# Altium PCB Pranus_PSH-C_B4_2015年3月30日.PcbDoc (part 1 of 2)
Units mil, origin at the board's own origin, x right, y up, seen from the top; angles counter-clockwise.
Board outline 3352.66 x 2784.14 mil, 2 copper layers (Top Layer, Bottom Layer); 108 components, 78 nets, 412 pads, 296 vias.
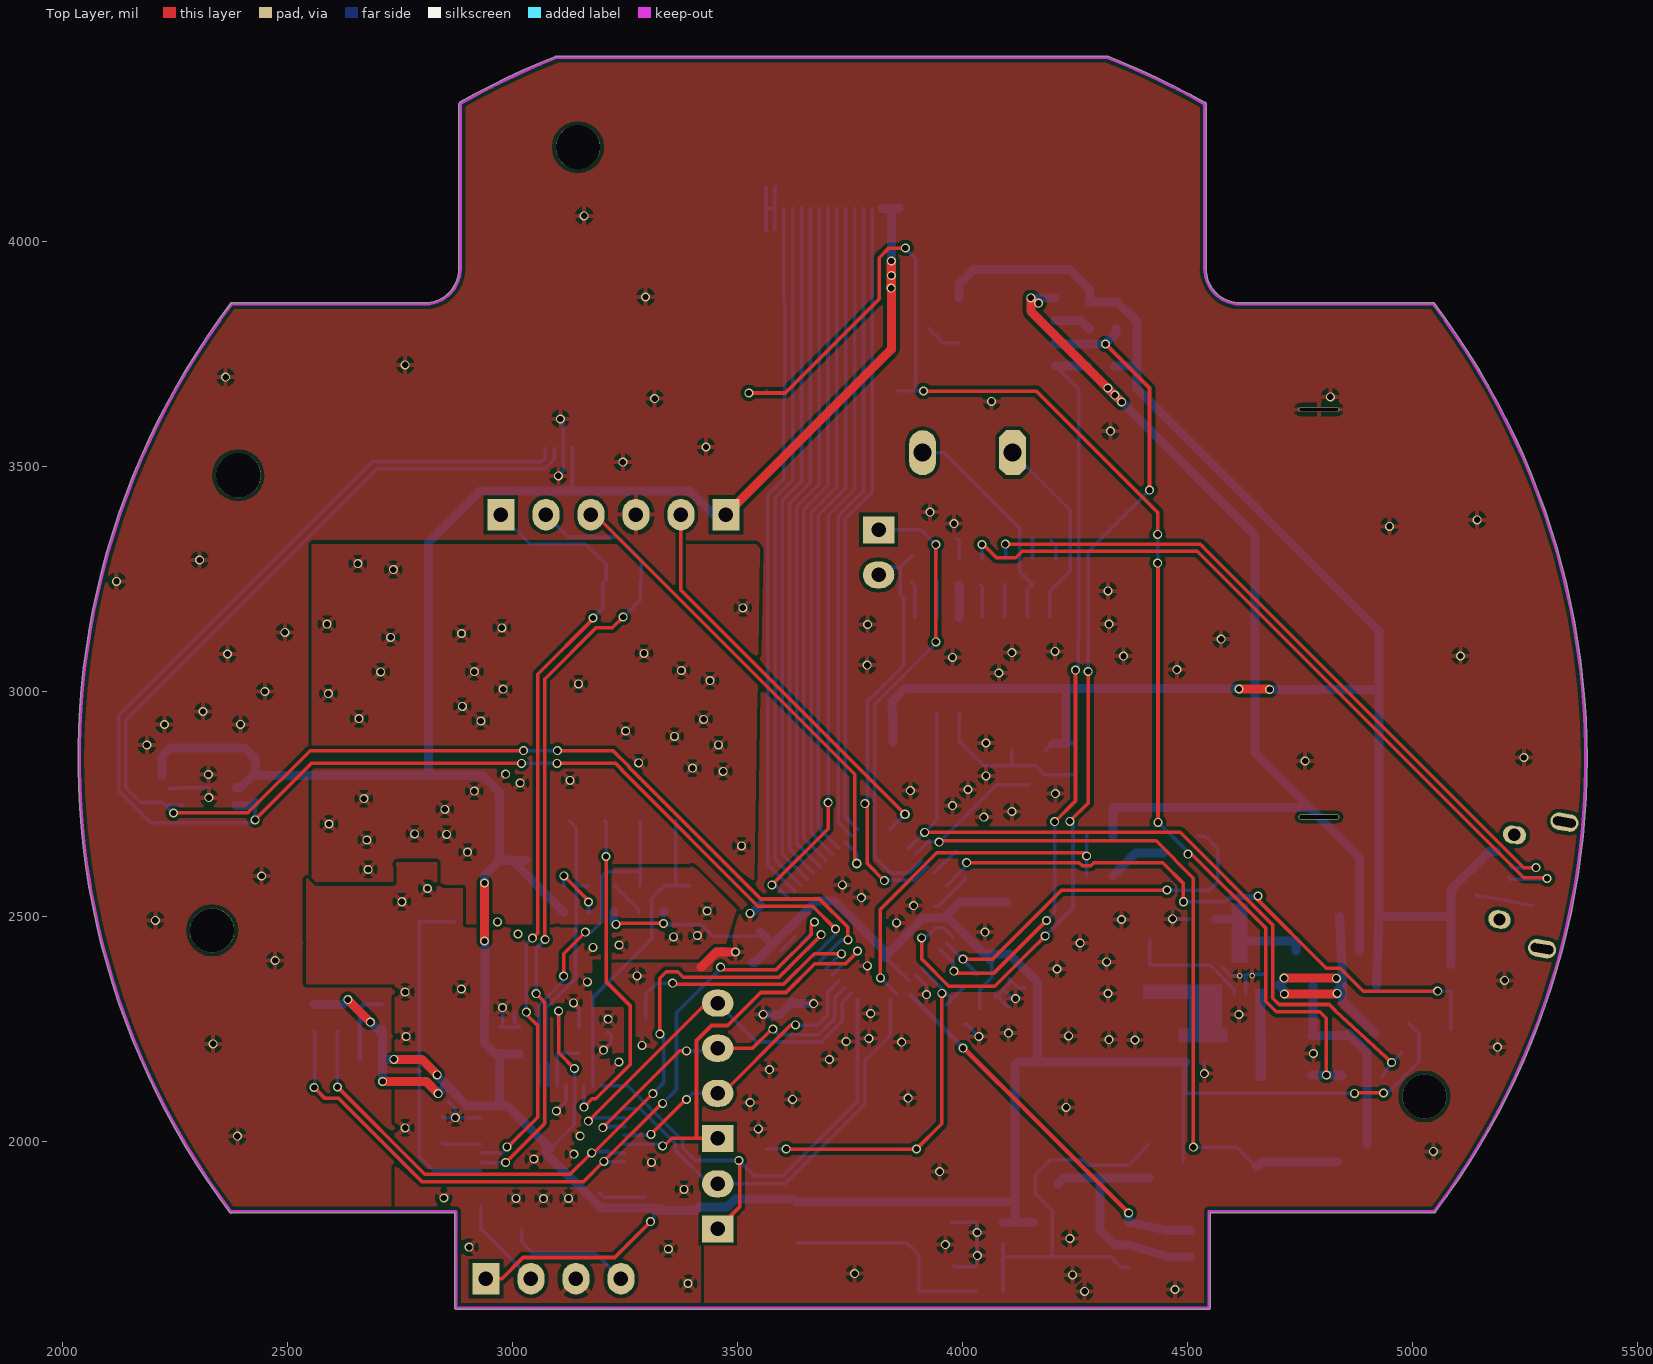
[diagram p0: Top Layer view]
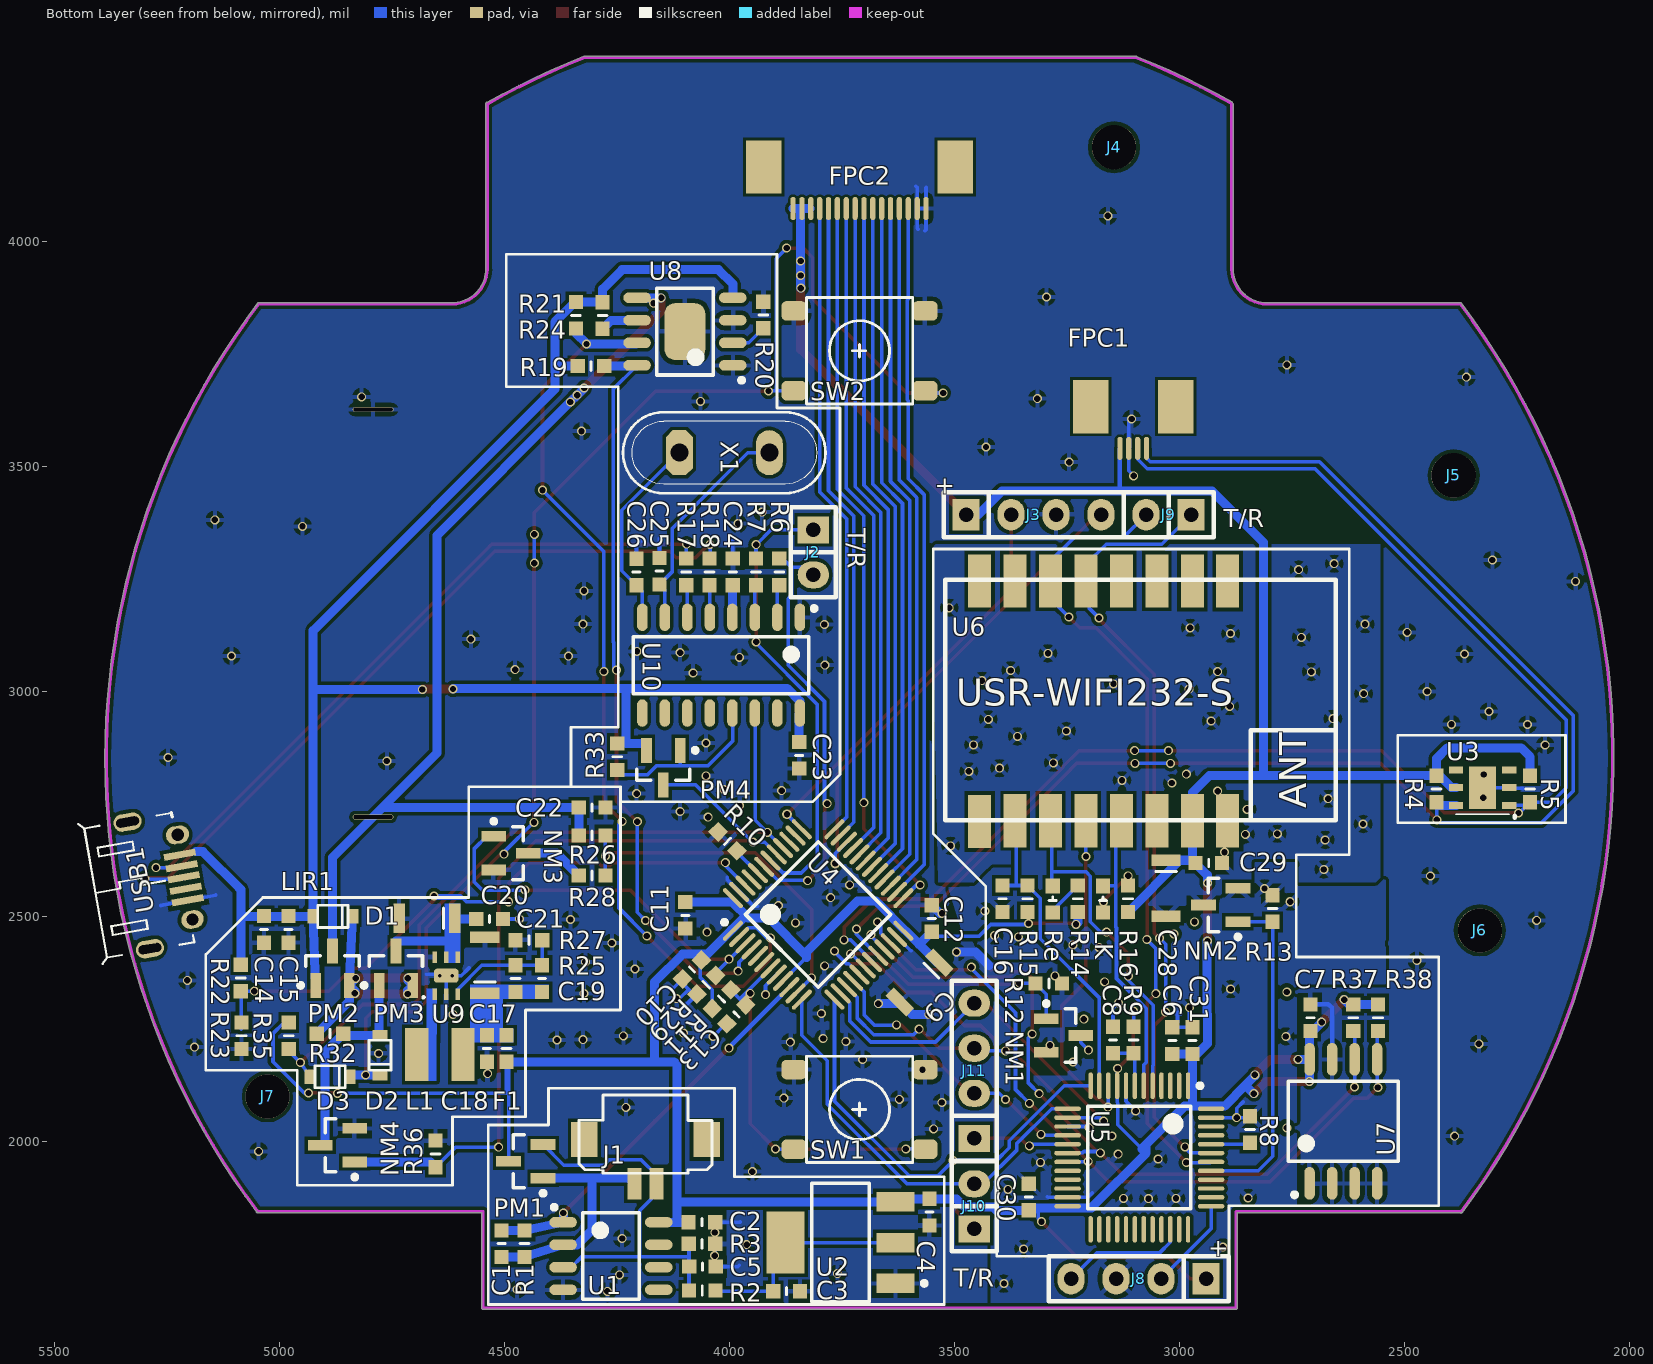
[diagram p1: Bottom Layer view, seen from below]

## Layer stack, top to bottom
Top Layer: signal copper 1.4
Dielectric: dielectric 12.6, FR-4, Dk 4.8
Bottom Layer: signal copper 1.4

## Board outline
2872.06,1630.69 2872.06,1841.53 2377.05,1841.53 cw(c2375.47,1844.27) 2372.95,1842.36 cw(c3711.84,2851.16) 2374.75,3862.35 cw(c2377.27,3860.44) 2377.27,3863.6 2806.32,3863.6 ccw(c2806.32,3939.18) 2881.9,3939.18 2881.9,4305.86 2883.5,4308.61 cw(c3711.83,2851.15) 3095.75,4410.24 cw(c3098.39,4408.5) 3098.39,4411.66 4322.19,4411.66 cw(c4322.19,4408.5) 4324.4,4410.77 cw(c3711.83,2851.15) 4537.94,4308.95 cw(c4538.61,4305.86) 4541.77,4305.86 4541.77,3939.18 ccw(c4617.35,3939.18) 4617.35,3863.6 5046.4,3863.6 cw(c5046.4,3860.44) 5048.92,3862.35 cw(c3711.84,2851.16) 5388.23,2851.16 cw(c3711.84,2851.16) 5051.74,1843.72 cw(c5048.85,1844.99) 5048.85,1841.83 4551.62,1841.83 4551.62,1630.69 cw(c4548.45,1630.69) 4548.45,1627.52 2875.22,1627.52 cw(c2875.22,1630.69)

## Design rules (kind name [scope] priority, off if disabled: settings)
Clearance "6mil Special" [(HasFootprint('FPC 0.5mm 4P') OR HasFootprint('FPC 0.5mm 16P'))] p1: gap=6
Clearance "8mil all" [All] p2: gap=8
ComponentClearance [All] p1: gap=0 collisioncheckmode=3 verticalgap=10 showdistances=FALSE
Height [All] p1: minheight=0 maxheight=2000 prefheight=500
HoleSize [All] p1: absolutevalues=TRUE maxlimit=1000 minlimit=1 maxpercent=80.000 minpercent=20.000
HoleToHoleClearance [All] p1: gap=8 allowstackedmicrovias=TRUE
MinimumSolderMaskSliver [All] p1: minsoldermaskwidth=0
PolygonConnect [All] p1: connectstyle=Relief reliefconductorwidth=10 reliefentries=4 polygonreliefangle="90 Angle" airgapwidth=10
RoutingCorners [All] p1: cornerstyle=45-Degree minsetback=10 maxsetback=100
RoutingVias [All] p1: holewidth=14 width=20 viastyle="Through Hole" minholewidth=14 minwidth=20 maxholewidth=100 maxwidth=200
SilkToSilkClearance [All] p1: silktosilkclearance=8
SilkToSolderMaskClearance [IsPad] p1: minsilkscreentomaskgap=0 clearancetoexposedcopper=TRUE
SolderMaskExpansion [All] p1: expansion=4
Width 20mil_Power [(InNet('EP_SUPPLY&VBAT') OR InNet('PSUPPLY') OR InNet('P_3.3V') OR InNet('PSUPPLYBAT') OR InNet('P_3.3V') OR InNet('P_5V'))] p1: maxlimit=1000 minlimit=8 preferedwidth=20
Width 8mil_Basic [All] p2: maxlimit=20 minlimit=8 preferedwidth=10
20 further rules are at their usual default settings.

## Classes and differential pairs
component class HCHOADC: C1 C2 C3 C4 C5 J1 PM1 R1 R2 R3 U1 U2
component class MCU: C6 C7 C8 C9 C10 C11 C12 C13 C16 C28 C29 C30 C31 FPC1 FPC2 J2 J3 J4 J5 J6 J7 J8 J9 J10 J11 Lk NM1 NM2 R4 R5 R6 R7 R8 R9 R10 R11 R12 R13 R14 R15 R16 R37 R38 Re SW1 U3 U4 U5 U6 U7
component class POWER: C14 C15 C17 C18 C19 C20 C21 C22 C23 C24 C25 C26 D1 D2 D3 F1 L1 LIR1 NM3 NM4 PM2 PM3 PM4 R17 R18 R19 R20 R21 R22 R23 R24 R25 R26 R27 R28 R29 R32 R33 R35 R36 SW2 U8 U9 U10 USB1 X1

## Components (designator, comment, footprint, x,y, rotation, side; value= is the part's Value field where it differs from the comment)
C1 "4.7uf" C0603 4506.95,1773.08 r90 bottom
C2 "1uf" C0603 4061.88,1820.64 r0 bottom
C3 "1uf" C0603 3873.89,1667.42 r0 bottom
C4 "1uf" C0603 3556.27,1843.13 r90 bottom
C5 "1uf" C0603 4060.6,1721.92 r0 bottom
C6 "1uf" C0603 2972.23,2224.16 r90 bottom
C7 "1uf" C0603 2710,2275 r90 bottom
C8 "1uf" C0603 3148.51,2225.58 r90 bottom
C9 "10uf" PolarC1206 3578.2,2353.7 r315 bottom
C10 "1uf" C0603 4083.99,2382.28 r315 bottom
C11 "1uf" C0603 4098.91,2502.47 r270 bottom
C12 "1uf" C0603 3551.32,2495.45 r90 bottom
C13 "1uf" C0603 3985.44,2282.59 r315 bottom
C14 "10uf" C0603 5034.76,2471.17 r90 bottom
C15 "1uf" C0603 4980.76,2471.17 r90 bottom
C16 "1uf" C0603 3394.26,2539.34 r270 bottom
C17 "10uf" PolarC1206 4544.25,2391.51 r90 bottom
C18 "1uf" C0603 4539.78,2206.54 r270 bottom
C19 "75pf" C0603 4417.11,2362.03 r90 bottom
C20 "10uf" PolarC1206 4672.74,2495.88 r0 bottom
C21 "1uf" C0603 4533.69,2494.24 r0 bottom
C22 "10uf" C0603 4305.93,2741.88 r0 bottom
C23 "1uf" C0603 3845.86,2857.97 r270 bottom
C24 "0.01uf" C0603 3993.39,3265.57 r90 bottom
C25 "12pf" C0603 4156.16,3267.17 r90 bottom
C26 "12pf" C0603 4207.46,3265.27 r90 bottom
C28 "10uf" PolarC1206 3030.78,2562.67 r270 bottom
C29 "1uf" C0603 2935.96,2618.63 r180 bottom
C30 "1uf" C0603 3335.66,1876.67 r90 bottom
C31 "1uf" C0603 3016.82,2224.16 r90 bottom
D1 "1N5817" SOD323(0805) 4881.76,2500.17 r180 bottom
D2 "1N5817" SOD323(0805) 4777.18,2191.74 r270 bottom
D3 "1N5817" SOD323(0805) 4888.17,2143.94 r180 bottom
F1 "11R" R0603 4496.24,2206.54 r270 bottom (schematic designator Ferrite1)
FPC1 "FPC 4P" "FPC 0.5mm 4P" 3133.2,3540.07 r0 bottom
FPC2 "FPC 0.5mm 16P" "FPC 0.5mm 16P" 3711.76,4119.16 r0 bottom
J1 "Mx 1.25 2P" "MX 1.25 2P" 4187.19,1955.26 r0 bottom
J2 "CON2" CON2 3814.16,3308.97 r270 bottom
J3 "CON4" CON4 3325.06,3392.67 r180 bottom
J4 "CON1" 2.5MM 3146.33,4209.04 r180 bottom locked
J5 "CON1" 2.5MM 2391.76,3480.17 r180 bottom
J6 "CON1" 2.5MM 2333.41,2468.89 r180 bottom locked
J7 "CON1" 2.5MM 5027.11,2099.99 r180 bottom locked
J8 "CON4" CON4 3091.76,1695.17 r0 bottom
J9 "CON2" CON2 3025.06,3392.67 r0 bottom
J10 "CON2" CON2 3456.86,1856.07 r90 bottom
J11 "CON4" CON4 3456.76,2157.17 r90 bottom
L1 "4.4uh" GDNR3012 4644.36,2193.34 r270 bottom
LIR1 "LIR2477" LIR2477_INLINE 4792.58,3193.4 r270 bottom
LK "White" LED0603 3170.91,2538.36 r90 bottom (schematic designator LED1)
NM1 "Si2302" SOT23-3 3258.58,2235.57 r180 bottom
NM2 "Si2302" SOT23-3 2909.44,2525.55 r0 bottom
NM3 "Si2302" SOT23-3 4486.07,2640.6 r180 bottom
NM4 "Si2302" SOT23-3 4871.69,1991.75 r0 bottom
PM1 "J177" SOT23-3 4453.16,1955.92 r0 bottom
PM2 "Si2303" SOT23-3 4882.76,2385.17 r90 bottom
PM3 "Si2303" SOT23-3 4741.76,2385.17 r90 bottom
PM4 "Si2303" SOT23-3 4147.76,2830.67 r270 bottom
R1 "1M" R0603 4456.23,1773.08 r90 bottom
R2 "10K" R0603 4061.18,1668.76 r180 bottom
R3 "2K" R0603 4061.71,1772.76 r0 bottom
R4 "10K" R0603 2429.86,2783.17 r270 bottom
R5 "10K" R0603 2221.86,2783.17 r270 bottom
R6 "1K" R0603 3890.06,3265.57 r270 bottom
R7 "1K" R0603 3941.73,3265.57 r270 bottom
R8 "10K" R0603 2844.01,2026.57 r90 bottom
R9 "10K" R0603 3102.72,2225.57 r90 bottom
R10 "10K" R0603 4005.06,2666.97 r225 bottom
R11 "10K" R0603 4018.25,2316.32 r135 bottom
R12 "10K" R0603 3291.16,2350.85 r0 bottom
R13 "10K" R0603 2793.91,2517.61 r270 bottom
R14 "1K" R0603 3226.75,2539.34 r270 bottom
R15 "10K" R0603 3338.42,2539.34 r270 bottom
R16 "1K" R0603 3115.07,2539.34 r270 bottom
R17 "55" R0603 4096.73,3265.57 r270 bottom
R18 "55" R0603 4045.06,3265.57 r270 bottom
R19 "10K" R0603 4308.36,3722.77 r180 bottom
R20 "10K" R0603 3925.56,3836.37 r90 bottom
R21 "10K" R0603 4342.06,3835.57 r270 bottom
R22 "15K" R0603 5086.56,2363.27 r90 bottom
R23 "10K" R0603 5085,2235 r90 bottom
R24 "10K" R0603 4282.56,3835.27 r270 bottom
R25 "120K" R0603 4475.94,2362.03 r270 bottom
R26 "1M" R0603 4305.99,2680.2 r180 bottom
R27 "27K" R0603 4446.31,2447.29 r180 bottom
R28 "1M" R0603 4305.89,2591 r0 bottom
R29 "10K" R0603 4052.29,2348.29 r135 bottom
R32 "10K" R0603 4888.17,2239.55 r0 bottom
R33 "10K" R0603 4250,2855 r270 bottom
R35 "10K" R0603 4980,2235 r90 bottom
R36 "10K" R0603 4653.76,1972.38 r270 bottom
R37 "1K" R0603 2615,2275 r90 bottom
R38 "1K" R0603 2560,2275 r270 bottom
Re "White" LED0603 3282.59,2538.36 r90 bottom
SW1 "6x6x5" Patch6x6x5 3711.76,2071.17 r0 bottom locked
SW2 "6x6x5" Patch6x6x5 3711.76,3756.72 r0 bottom locked
U1 "AD8629ARZ" SOIC8_39MM 4264.14,1745.55 r180 bottom
U2 "1117-1.2" SOT223 3754.08,1775.41 r90 bottom
U3 "HTU21D" HTU21D 2327.41,2786.2 r90 bottom
U4 "STM32F030C8T6" TSQFP50P900X900X160-48L 3803.77,2504.47 r135 bottom
U5 "STM32F030C8T6" TSQFP50P900X900X160-48L 3090.16,1964.41 r270 bottom
U6 "USR-WIFI232-S" USR-WIFI232-S 3046.76,2978.17 r180 bottom
U7 "24LC512K" SOIC8_53MM 2636.46,2045.27 r90 bottom
U8 "TP4056" SOIC8 4099.71,3799.49 r0 bottom
U9 "TPS62260" QFN2X2-6 4655.76,2327.17 r90 bottom
U10 "CH340G" SOP-16 4019.2,3058.27 r270 bottom
USB1 "MicroUSB" MICROUSB 5261.76,2578.18 r170 bottom locked
X1 "12MHZ" HC-49 4012.16,3530.37 r180 bottom

## Footprints (in the part's own frame and the unit in brackets; to place one, negate y for a bottom-side part, rotate by r counter-clockwise, add the part's x,y. Pads: shape width x height; smd on the part's side, far side on the other; paste and mask are expansions set on the pad)
2.5MM [mm]
  round 2.5 hole 2.5: 1(0,0)
C0603 [mm]
  rect 0.8x0.8 smd: 1(-0.75,0) 2(0.75,0)
  silkscreen extent 0,-0.2 0,0.2, body extent -0.8,-0.4 0.8,0.4, height 0.8
CON2 [mil]
  rect 60x70 hole 32: 1(-50,0)
  oval 60x70 hole 32: 2(50,0)
  silkscreen extent -100,-50 100,50, body extent -101,-50 100,50, height 295
CON4 [mil]
  rect 60x70 hole 32: 1(-150,0)
  oval 60x70 hole 32: 2(-50,0) 3(50,0) 4(150,0)
  silkscreen extent -200,-50 200,50, body extent -201,-50 199,50, height 295
"FPC 0.5mm 4P" [mm]
  oval 0.3x1.3 smd: 1(-1.5,0) 2(-1,0) 3(-0.5,0) 4(0,0)
  rect 2x3 smd: ""(-3.15,-2.35) ""(1.65,-2.35)
  body extent -4.54,-5.07 3.1,0.5, height 2
"FPC 0.5mm 16P" [mm]
  oval 0.3x1.3 smd: 1(-3.75,1.175) 2(-3.25,1.175) 3(-2.75,1.175) 4(-2.25,1.175) 5(-1.75,1.175) 6(-1.25,1.175) 7(-0.75,1.175) 8(-0.25,1.175) 9(0.25,1.175) 10(0.75,1.175) 11(1.25,1.175) 12(1.75,1.175) 13(2.25,1.175) 14(2.75,1.175) 15(3.25,1.175) 16(3.75,1.175)
  rect 2x3 smd: ""(-5.4,-1.175) ""(5.4,-1.175)
  body extent -6.79,-3.89 6.75,1.68, height 2
GDNR3012 [mm]
  rect 3x1.3 smd: 1(0,1.3) 2(0,-1.3)
  body extent -1.5,-1.5 1.5,1.5, height 1.2
HC-49 [mil]
  oct 60x100 hole 40: 1(-100,0)
  oval 60x100 hole 40: 2(100,0)
  silkscreen extent -225,-90 225,90, body extent -224,-91 226,89, height 134
HTU21D [mm]
  rect 2.4x1.524 smd: 0(0,0)
  rect 0.4x0.8 smd: 1(-1,-1.5) 2(0,-1.5) 3(1,-1.5) 4(1,1.5) 5(0,1.5) 6(-1,1.5)
  silkscreen extent -1.7,-1.8 -1.5,1.5
LED0603 [mm]
  rect 0.8x0.8 smd: A(-0.75,0)
  rect 0.85x0.8 smd: C(0.75,0)
  silkscreen extent -0.07,-0.2 0.13,0.2, body extent -0.8,-0.4 0.8,0.4, height 0.8
LIR2477_INLINE [mm]
  oval 0.3x2.3 hole 0.2 slot 2.2 at 90 deg: 1(12,0)
  oval 0.25x2.3 hole 0.2 slot 2.2 at 90 deg: 2(-11,0)
  body extent -12,-12.08 12.1,12.08, height 7.7
MICROUSB [mm]
  oval 1.6x1 hole 0.5 slot 1.3 at 0 deg unplated: 0(-1.325,-3.625) 0(-1.325,3.625)
  rect 1.8x0.4 smd: 1(1.25,1.3) 2(1.25,0.65) 3(1.25,0) 4(1.25,-0.65) 5(1.25,-1.3)
  oval 1.321x1.016 hole 0.7 unplated: ""(1.325,2.425)
  oval 1.27x1.016 hole 0.7 unplated: ""(1.325,-2.425)
  silkscreen extent -4.1,-4 1.2,4, body extent -3.62,-3.96 1.81,4.02, height 2.74
"MX 1.25 2P" [mm]
  rect 0.8x1.8 smd: 1(-0.625,1.25) 2(0.625,1.25)
  rect 1.5x2 smd: ""(-3.45,-1.25) ""(3.45,-1.25)
  silkscreen extent -3.75,-3.76 3.75,0.66, body extent -3.74,-3.79 3.75,1.67, height 3.5
Patch6x6x5 [mm]
  rrect50% 1.4x1.1 smd: 1(-3.7,2.25) 2(-3.7,-2.25) 3(3.7,-2.25) 4(3.7,2.25)
  silkscreen extent -3,-3 3,3, body extent -4.13,-3 4.13,3, height 5
PolarC1206 [mm]
  rect 0.65x1.65 smd: A(-1.575,0) C(1.575,0)
  silkscreen extent -0.94,-0.58 -0.94,0.58, body extent -1.6,-0.8 1.6,0.8, height 0.6
QFN2X2-6 [mm]
  rect 0.65x0.25 smd: 1(0,0) 2(0,-0.65) 3(0,-1.3) 4(2.1,-1.3) 5(2.1,-0.65) 6(2.1,0)
  round 0.3 hole 0.2: 7(1.04,-1) 7(1.05,-0.29)
  rrect50% 0.8x1.4 smd: 7(1.05,-0.65)
  body extent 0.22,-1.59 1.86,0.29, height 3.4
R0603 [mm]
  rect 0.8x0.8 smd: 1(-0.75,0) 2(0.75,0)
  silkscreen extent 0,-0.25 0,0.25, body extent -0.8,-0.4 0.8,0.4, height 0.5
SOD323(0805) [mm]
  rect 0.63x0.83 smd: A(-1.115,0) C(1.115,0)
  silkscreen extent -0.85,-0.63 0.85,0.63, body extent -0.85,-0.63 0.86,0.63, height 1.1
SOIC8 [mm]
  oval 1.55x0.6 smd: 1(-2.7,1.905) 2(-2.7,0.635) 3(-2.7,-0.635) 4(-2.7,-1.905) 5(2.7,-1.905) 6(2.7,-0.635) 7(2.7,0.635) 8(2.7,1.905)
  rrect50% 2.3x3.2 smd: 9(0,0)
  silkscreen extent -3.32,-2.45 1.6,2.87, body extent -1.65,-2.41 1.65,2.41, height 1.35
SOIC8_39MM [mm]
  oval 1.55x0.6 smd: 1(-2.7,1.905) 2(-2.7,0.635) 3(-2.7,-0.635) 4(-2.7,-1.905) 5(2.7,-1.905) 6(2.7,-0.635) 7(2.7,0.635) 8(2.7,1.905)
  silkscreen extent -3.33,-2.45 1.6,2.87, body extent -1.65,-2.41 1.65,2.41, height 3.4
SOIC8_53MM [mm]
  oval 1.85x0.6 smd: 1(-3.51,1.915) 2(-3.51,0.645) 3(-3.51,-0.625) 4(-3.51,-1.895) 5(3.49,-1.895) 6(3.49,-0.625) 7(3.49,0.645) 8(3.49,1.915)
  silkscreen extent -4.28,-3.09 2.24,3.11, body extent -2.26,-3.11 2.24,3.11, height 3.4
SOP-16 [mm]
  oval 1.55x0.6 smd: 1(-2.7,4.445) 2(-2.7,3.175) 3(-2.7,1.905) 4(-2.7,0.635) 5(-2.7,-0.635) 6(-2.7,-1.905) 7(-2.7,-3.175) 8(-2.7,-4.445) 9(2.7,-4.445) 10(2.7,-3.175) 11(2.7,-1.905) 12(2.7,-0.635) 13(2.7,0.635) 14(2.7,1.905) 15(2.7,3.175) 16(2.7,4.445)
  silkscreen extent -3.32,-4.95 1.6,5.37, body extent -1.91,-4.95 1.91,4.95, height 1
SOT23-3 [mm]
  rect 1.4x0.6 smd: 1(-0.975,0.95) 2(-0.975,-0.95) 3(0.975,0)
  silkscreen extent -1.1,-1.5 0.7,1.92, body extent -0.7,-1.5 0.7,1.5, height 1
SOT223 [mm]
  rect 1.1x2.15 smd: 1(-2.3,-3.1) 2(0,-3.1) 3(2.3,-3.1)
  rect 3.5x2.15 smd: 4(0,3.1)
  silkscreen extent -3.35,-4.85 3.35,1.63, body extent -3.3,-3.2 3.3,3.1, height 1.7
TSQFP50P900X900X160-48L [mm] "TSQFP, 48-Leads, Body 7.00x7.00mm, Pitch 0.50mm, IPC High Density"
  oval 1.5x0.25 smd: 1(-4.05,2.75) 2(-4.05,2.25) 3(-4.05,1.75) 4(-4.05,1.25) 5(-4.05,0.75) 6(-4.05,0.25) 7(-4.05,-0.25) 8(-4.05,-0.75) 9(-4.05,-1.25) 10(-4.05,-1.75) 11(-4.05,-2.25) 12(-4.05,-2.75) 25(4.05,-2.75) 26(4.05,-2.25) 27(4.05,-1.75) 28(4.05,-1.25) 29(4.05,-0.75) 30(4.05,-0.25) 31(4.05,0.25) 32(4.05,0.75) 33(4.05,1.25) 34(4.05,1.75) 35(4.05,2.25) 36(4.05,2.75)
  oval 0.25x1.5 smd: 13(-2.75,-4.05) 14(-2.25,-4.05) 15(-1.75,-4.05) 16(-1.25,-4.05) 17(-0.75,-4.05) 18(-0.25,-4.05) 19(0.25,-4.05) 20(0.75,-4.05) 21(1.25,-4.05) 22(1.75,-4.05) 23(2.25,-4.05) 24(2.75,-4.05) 37(2.75,4.05) 38(2.25,4.05) 39(1.75,4.05) 40(1.25,4.05) 41(0.75,4.05) 42(0.25,4.05) 43(-0.25,4.05) 44(-0.75,4.05) 45(-1.25,4.05) 46(-1.75,4.05) 47(-2.25,4.05) 48(-2.75,4.05)
  silkscreen extent -4.17,-2.9 2.9,3.55, body extent -3.5,-3.5 3.5,3.5, height 1.6
USR-WIFI232-S [mm]
  rect 1.3x3 smd: 1(3.886,6.794) 2(1.887,6.794) 3(-0.112,6.794) 4(-2.112,6.794) 5(-4.111,6.794) 6(-6.111,6.795) 7(-8.11,6.795) 8(-10.109,6.795) 9(-10.109,-6.794) 10(-8.11,-6.744) 11(-6.111,-6.744) 12(-4.111,-6.744) 13(-2.112,-6.744) 14(-0.112,-6.744) 15(1.887,-6.744) 16(3.886,-6.744)
  silkscreen extent -12.07,-6.72 9.98,6.85, body extent -12.07,-6.73 10.03,6.86, height 3.4

## Part data
C1 C2 C3 C4 C5 C6 C7 C8 C10 C11 C12 C13 C14 C15 C16 C18 C19 C21 C22 C23 C24 C25 C26 C29 C30 C31: library part C
C9 C17 C20 C28: library part PolarCap
D1 D2 D3: library part Diode
F1 R1 R2 R3 R4 R5 R6 R7 R8 R9 R10 R11 R12 R13 R14 R15 R16 R17 R18 R19 R20 R21 R22 R23 R24 R25 R26 R27 R28 R29 R32 R33 R35 R36 R37 R38: library part R
FPC2: library part "FPC 16P"
J1: library part MX
L1: library part L
LK Re: library part LED
NM1 NM2 NM3 NM4: library part NMOS
PM2 PM3 PM4: library part PMOS
SW1 SW2: library part SW
U1: library part AD8629, "Amplifier"
U2: library part 1117
X1: library part CRYSTAL

## Via types
v1: diameter 20, hole 14, Top Layer to Bottom Layer, 294 vias
v2: diameter 22, hole 14, Top Layer to Bottom Layer, 2 vias

## Nets (pads, with @x,y where several pads share a name; then routed paths per layer and width w, separated by ;. In a path a pad name is that pad's centre, name@x,y a point inside that pad or via, vN(x,y) a via of type N, cw(c..) or ccw(c..) an arc to the next point about the centre after c; other vN are vias at no path point)
EP_SUPPLY&VBAT: D1.C PM2.2 PM3.2 R32.2 | length 613.7
  Top Layer w20: v1(4715.46,2362.98) 4831.01,2362.98 v1(4831.31,2362.68) ; v1(4715.75,2327.72) 4831.61,2327.72 v1(4833.09,2329.2)
  Bottom Layer w20: v1(4715.46,2362.98) 4715.46,2357.89 PM3.2@4704.36,2346.78 4715.75,2335.39 v1(4715.75,2327.72) ; v1(4831.31,2362.68) PM2.2@4845.26,2348.73 ; v1(4833.09,2329.2) 4833.09,2334.52 PM2.2@4845.36,2346.78 ; D1.C@4837.86,2500.17 4844.55,2363.33 PM2.2@4845.26,2348.73 ; R32.2@4917.7,2239.55 4845.36,2311.89 PM2.2@4845.36,2346.78 ; PM2.2@4845.26,2348.73 PM2.2@4845.36,2346.78 ; PM2.2@4845.26,2348.73 4845.36,2348.63 PM2.2@4845.36,2346.78
GND: C2.1 C3.1 C4.1 C5.1 C7.2 C9.C C10.2 C11.2 C12.2 C13.2 C14.1 C15.1 C17.C C18.2 C20.C C21.1 C22.1 C23.2 C24.2 C25.2 C26.2 FPC1.3 FPC2.1 FPC2.2 J3.3 LIR1.2 NM1.2 NM3.2 NM4.2 R3.1 R10.1 R12.1 R20.2 R23.1 R27.1 R29.1 R36.1 SW1.2 SW1.3 SW2.2 SW2.3 U1.4 U2.1 U3.0 U3.2 U4.8 U4.23 U4.47 U7.1 U7.2 U7.3 U7.4 U7.7 U8.1 U8.3 U8.9 U9.2 U9.6 U9.7 U10.1 USB1.5 | length 2041.6
  Top Layer w20: 3420.06,2387.17 3453.75,2420.86 v1(3496.18,2420.86)
  Bottom Layer w8: 2237.04,2783.29 2238.7,2784.95 2267.1,2784.95 U3.2@2268.35,2786.2 U3.0@2327.41,2786.2 ; v1(3102.51,3479.02) 3113.52,3490.03 FPC1.3@3113.52,3540.07 3113.52,3599.12 v1(3107.2,3605.44) ; 3563.15,4119.85 3564.12,4118.88 FPC2.1@3564.12,4072.9 ; 3566.36,4023.76 3564.12,4026 FPC2.1@3564.12,4072.9 ; 3581.77,4026.77 3583.81,4028.81 FPC2.2@3583.81,4072.9 ; 3586.97,4122.65 3583.81,4119.49 FPC2.2@3583.81,4072.9 ; 3596.57,2423.84 3597.87,2423.84 U4.23@3628.39,2454.36 ; U4.8@3895.64,2370.84 3920.66,2345.82 v1(3920.66,2326.37) ; 3937.87,2522.5 3947.07,2522.5 U4.47@3979.15,2554.58 4005.95,2581.38 4005.95,2586.59 ; v1(3962.36,1770.77) v1@3964.35,1772.76 ; 3976.56,1821.37 3977.29,1820.64 C2.1@4032.35,1820.64 4032.35,1723.2 C5.1@4031.07,1721.92 3982.41,1721.92 3979.06,1725.27 ; 3987.96,3340.07 3993.39,3334.64 C24.2@3993.39,3295.1 ; C13.2@4006.32,2261.71 4006.32,2259.21 4011.22,2259.21 v1(4037.06,2233.37) ; 4105.06,2298.67 4101.91,2298.67 R29.1@4077.19,2323.39 ; v1(4118.46,2317.17) 4112.06,2317.17 4091.52,2337.71 ; 4138.16,2340.67 4125.6,2340.67 C10.2@4104.87,2361.4 4104.87,2351.06 4091.52,2337.71 ; C25.2@4156.16,3296.7 4156.16,3339.57 4156.26,3339.67 ; 4197.36,3334.87 4207.46,3324.77 C26.2@4207.46,3294.8 ; v1(4467.56,2494.87) 4468.19,2494.24 C21.1@4504.16,2494.24 ; v1(4537.86,2150.67) 4537.86,2175.09 C18.2@4539.78,2177.01 ; 4579.42,2385.61 4596.52,2368.51 U9.7@4630.17,2368.51 ; U9.2@4630.17,2327.17 U9.7@4630.17,2368.51 ; 4674.73,2371.54 4633.2,2371.54 U9.7@4630.17,2368.51 ; 5142.03,2547.58 USB1.5@5204.41,2536.32 5264.57,2524.37 ; FPC2.1@3564.12,4072.9 FPC2.2@3583.81,4072.9 ; R29.1@4077.19,2323.39 4091.52,2337.71 ; R29.1@4077.19,2323.39 4073.17,2319.36 R29.1@4073.17,2327.41 R29.1@4077.19,2323.39
  Bottom Layer w10: U7.7@2661.85,2182.67 2661.85,2296.85 2670,2305 2670.47,2304.53 C7.2@2710,2304.53
  Bottom Layer w20: 3423.67,2390.57 3453.96,2420.86 v1(3496.18,2420.86) ; v1(3528.44,2507.06) 3533.4,2507.06 C12.2@3551.32,2524.98 ; v1(3557.7,2282.62) 3594.81,2282.62 C9.C@3622.05,2309.85 3625.61,2306.29 v1(3669.86,2306.29)
  other v1: 4271.94,1666.99 4472.64,1671.17 4245.18,1703.78 3761.06,1706.17 4033.56,1746.27 4239.06,1784.57 4033.16,1797.97 3950.06,1932.97 5046.76,1978.07 2389.52,2011.79 3547.16,2028.27 4231.06,2075.87 3529.06,2086.57 3623.36,2093.57 3879.86,2096.17 3571.96,2159.67 3704.76,2182.37 4780.26,2195.67 5189.36,2209.57 3288.56,2213.77 2335.76,2216.86 3865.66,2220.67 3742.16,2221.97 4383.96,2225.47 4326.16,2226.37 3792.66,2228.97 4236.66,2234.77 4102.76,2240.67 4614.46,2282.17 3796.56,2284.37 4324.06,2328.67 5205.36,2358.17 3277.66,2368.07 4210.76,2383.17 3789.06,2390.17 4321.06,2399.27 2473.46,2402.07 4262.26,2441.17 4050.59,2465.21 3853.91,2485.88 2207.41,2491.37 4353.96,2493.17 3892.31,2523.81 3775.76,2541.64 3733.71,2570.43 2443.66,2589.97 4047.96,2720.57 4110.26,2733.07 3978.66,2746.07 2326.22,2763.8 4207.06,2772.67 3884.76,2779.57 4012.66,2781.97 4053.06,2812.57 2325.15,2815.36 4762.16,2845.17 5247.76,2853.17 2188.44,2880.76 4052.66,2885.17 2227.53,2926.52 2396.48,2926.92 2313.32,2955.33 2450.56,2999.77 4081.46,3040.97 4476.86,3048.17 3788.86,3058.27 3978.66,3075.87 4358.36,3078.37 5107.16,3078.77 2367.62,3082.95 4110.26,3086.07 4205.96,3089.17 4575.36,3116.17 2495.14,3131.22 3790.06,3148.77 4326.16,3149.27 4323.76,3223.47 2121.19,3244.57 2305.9,3292.01 4949.26,3366.67 3981.76,3372.57 5144.26,3381.27 3928.26,3398.07 3246.12,3509.32 3430.66,3543.17 4329.36,3578.17 4065.16,3644.57 3316.82,3650.43 4817.86,3654.67 2363.64,3698.18 2762.41,3725.54 3296.48,3876.37 3160.04,4056.56
I2CSCL: FPC1.1 R4.2 U3.6 U4.20 | length 3369.4
  Top Layer w8: v1(2429.18,2714.79) 2429.18,2715.29 2554.16,2840.27 v1(3020.76,2840.27) ; v1(3099.56,2840.07) 3099.66,2839.97 3230.17,2839.97 3243.16,2826.98 3243.16,2825.63 3545.92,2522.87 3667.96,2522.87 v1(3718.56,2472.27)
  Bottom Layer w8: R4.2@2423.05,2746.83 2428.59,2752.37 2429.18,2751.78 v1@2429.18,2715.29 ; v1(2429.18,2714.79) v1@2429.18,2715.29 ; v1(3020.76,2840.27) 3021.06,2839.97 v1@3099.56,2839.97 ; FPC1.1@3074.15,3540.07 3074.05,3518.38 3066.11,3510.44 2689.93,3510.44 2125.63,2946.14 2125.63,2779.02 2196.58,2708.07 2421.96,2708.07 v1@2429.18,2715.29 ; U4.20@3670.14,2412.6 3671,2412.6 3718.56,2460.16 v1(3718.56,2472.27)
  Bottom Layer w20: U3.6@2386.47,2746.83 R4.2@2423.05,2746.83 ; R4.2@2428.59,2752.37 R4.2@2429.86,2753.64
I2CSDA: FPC1.2 R5.2 U3.1 U4.19 | length 3366.6
  Top Layer w8: v1(2247.56,2730.07) 2412.85,2730.07 2551.25,2868.47 v1(3025.26,2868.47) ; v1(3100.46,2868.47) 3224.3,2868.47 3259.16,2833.61 3259.16,2832.26 3552.55,2538.87 3683.07,2538.87 3746.06,2475.88 v1(3746.06,2448.07)
  Bottom Layer w8: v1(2247.56,2730.07) 2245.43,2730.07 R5.2@2228.67,2746.83 ; U3.1@2268.35,2746.83 R5.2@2228.67,2746.83 ; v1(3025.26,2868.47) v1(3100.46,2868.47) ; FPC1.2@3093.83,3540.07 3093.83,3515.54 3072.74,3494.44 2699.59,3494.44 2141.64,2936.49 2141.64,2785.64 2173.64,2753.64 R5.2@2221.86,2753.64 R5.2@2228.67,2746.83 ; U4.19@3684.06,2398.68 3684.06,2400.49 3731.65,2448.07 v1(3746.06,2448.07)
IIC_FLASH_SCL: R37.1 U4.21 U5.18 U7.6 | length 1782
  Top Layer w8: v1(2612.06,2120.97) 2806.06,1926.97 3128.76,1926.97 v1(3176.66,1974.87) 3181.46,1974.87 v1(3312.76,2106.17) ; v1(3328.16,2238.97) 3327.76,2239.37 3327.76,2362.85 3342.3,2377.39 3367.89,2377.39 3380.11,2365.17 3592.93,2365.17 3686.76,2459 v1(3686.76,2459.47)
  Bottom Layer w8: v1(2612.06,2120.97) 2611.85,2121.18 U7.6@2611.85,2182.67 2611.85,2242.33 R37.1@2615,2245.47 ; v1(3176.66,1974.87) 3179.66,1977.87 3212.87,1977.87 3215.87,1974.87 3248.99,1974.87 U5.18@3249.61,1974.25 ; v1(3312.76,2106.17) 3336.52,2129.93 3336.52,2230.61 v1(3328.16,2238.97) ; U4.21@3656.22,2426.52 3686.76,2457.06 v1(3686.76,2459.47)
IIC_FLASH_SDA: R38.2 U4.22 U5.19 U7.5 | length 1789.2
  Top Layer w8: v1(2560.16,2119.97) 2584.47,2095.66 2614.75,2095.66 2799.43,1910.97 3158.86,1910.97 v1(3203.76,1955.87) 3329.06,2081.17 3329.06,2081.57 3332.46,2084.97 v1(3334.56,2084.97) ; v1(3463.27,2387.17) 3469.14,2381.3 3586.43,2381.3 3664.76,2459.63 3664.76,2480.56 v1(3671.95,2487.75)
  Bottom Layer w8: R38.2@2560,2245.47 2561.85,2243.62 U7.5@2561.85,2182.67 2561.85,2121.66 v1(2560.16,2119.97) ; v1(3203.76,1955.87) 3205.06,1954.57 U5.19@3249.61,1954.57 ; v1(3334.56,2084.97) 3365.16,2115.57 3365.16,2286.17 3463.27,2384.28 v1(3463.27,2387.17) ; U4.22@3642.3,2440.44 3664.76,2462.9 3664.76,2479.98 3671.95,2487.17 v1(3671.95,2487.75)
MCU_NRST: C8.1 R9.1 U5.7 | length 119.1
  Bottom Layer w8: U5.7@3100,2123.86 3100,2193.32 R9.1@3102.72,2196.04 C8.1@3148.5,2196.04
NetC1_1: C1.1 J1.2 PM1.1 R1.1 U1.2 | length 542.1
  Bottom Layer w20: J1.2@4211.8,1906.05 4224.27,1918.52 4305.64,1918.52 ; PM1.1@4414.77,1918.52 4305.64,1918.52 ; C1.1@4506.95,1743.55 R1.1@4456.23,1743.55 U1.2@4370.44,1770.55 4338.96,1770.55 4305.64,1803.87 4305.64,1918.52
NetC1_2: C1.2 R1.2 U1.1 U4.10 | length 849.1
  Top Layer w10: v1(4001.76,2207.47) 4003.57,2207.47 4166.52,2044.52 4166.65,2044.52 v1(4369.88,1841.29)
  Bottom Layer w10: U4.10@3884.66,2326.38 4003.57,2207.47 v1(4001.76,2207.47)
  Bottom Layer w20: v1(4369.88,1841.29) 4369.88,1821.11 U1.1@4370.44,1820.55 R1.2@4456.23,1802.61 C1.2@4506.95,1802.61
NetC3_2: C3.2 R2.2 U2.2 U2.4 | length 492.2
  Bottom Layer w8: U2.2@3632.03,1775.41 U2.4@3876.13,1775.41 3903.42,1748.12 C3.2@3903.42,1667.42 4030.31,1667.42 R2.2@4031.65,1668.76
NetC5_2: C5.2 J1.1 PM1.2 R2.1 R3.2 U1.3 | length 908
  Bottom Layer w8: R2.1@4090.71,1668.76 4090.71,1772.23 R3.2@4091.24,1772.76 4091.24,1746.26 4093.14,1744.36 4328.4,1744.36 4352.21,1720.55 U1.3@4370.44,1720.55 ; 4199.22,1744.36 4200.35,1745.49 4200.35,1846.52 4162.58,1884.29 J1.1@4162.58,1906.05 4162.58,1924.99 4197.11,1959.51 4267.81,1959.51 4280.06,1947.26 4368.71,1947.26 PM1.2@4414.77,1993.32
NetC17_A: C17.A C18.1 C19.1 F1.1 L1.1 R25.2
NetC19_2: C19.2 R25.1 R27.2 U9.3 | length 276.2
  Bottom Layer w8: R27.2@4416.78,2447.29 4416.78,2391.89 C19.2@4417.11,2391.56 R25.1@4475.94,2391.56 4550.84,2391.56 4604.58,2337.82 U9.3@4604.58,2327.17
NetC22_2: C22.2 LIR1.1 PM2.3 R26.1 U8.5 | length 2367
  Top Layer w20: v1(4169.46,3862.67) 4164.26,3862.67 v1(4152.46,3874.47) 4152.46,3844.77 v1(4338.96,3658.27) v1(4354.16,3643.07)
  Bottom Layer w20: v1(4152.46,3874.47) U8.5@4206.01,3874.49 ; v1(4323.46,3674.07) 4323.46,3673.77 v1(4338.96,3658.27) v1(4354.16,3643.07) 4650.35,3346.88 4650.35,2863.19 4882.76,2630.78 PM2.3@4882.76,2423.56 ; R26.1@4335.52,2680.2 4335.52,2741.82 C22.2@4335.46,2741.88 4768.16,2741.88
NetC24_1: C24.1 U10.4 | length 71.8
  Bottom Layer w20: C24.1@3993.39,3236.04 3994.2,3235.24 U10.4@3994.2,3164.57
NetC25_1: C25.1 U10.7 X1.2 | length 499.8
  Bottom Layer w8: X1.2@3912.16,3530.37 3959.86,3530.37 4127.46,3362.77 4127.46,3266.34 C25.1@4156.16,3237.64 4144.2,3225.68 U10.7@4144.2,3164.57
NetC26_1: C26.1 U10.8 X1.1 | length 434.9
  Bottom Layer w8: X1.1@4112.16,3530.37 4240.26,3402.27 4240.26,3268.37 C26.1@4209.73,3237.84 ; U10.8@4194.2,3164.57 4194.2,3222.48 C26.1@4207.46,3235.74
NetD2_A: D2.A NM4.3 PM3.1 R32.1 | length 456.8
  Bottom Layer w20: PM3.1@4779.16,2346.78 4779.16,2237.62 D2.A@4777.18,2235.64 4854.73,2235.64 R32.1@4858.65,2239.55 4899.75,2198.45 NM4.3@4899.75,1994.79
NetD2_C: D2.C D3.C SW2.1 SW2.4 | length 3130.1
  Top Layer w8: v1(3526.06,3663.07) 3606.76,3663.07 3815.76,3872.07 3815.76,3963.37 3837.36,3984.97 v1(3873.66,3984.97) ; v1(3913.82,3667.27) 4164.76,3667.27 4434.36,3397.67 v1(4434.36,3349.17) ; v1(4434.36,3285.07) 4434.97,3284.46 v1(4434.97,2709.01) v1@4434.56,2709.42 ; v1(4501.62,2638.53) 4510.11,2638.53 4674.21,2474.43 4674.21,2311.74 4697.58,2288.37 4794.63,2288.37 4808.87,2274.13 v1(4808.87,2147.84)
  Bottom Layer w8: v1(3526.06,3663.07) 3561.02,3663.07 SW2.1@3566.09,3668.14 ; SW2.4@3857.43,3668.14 3892.96,3668.14 ; v1(3873.66,3984.97) 3896.99,3961.64 3896.99,3672.17 3892.96,3668.14 ; v1(3913.82,3667.27) 3912.95,3668.14 3892.96,3668.14 ; v1(4434.36,3285.07) v1(4434.36,3349.17) ; v1(4434.97,2709.01) 4435.61,2709.01 4501.62,2643 v1(4501.62,2638.53)
  Bottom Layer w20: D2.C@4777.18,2147.84 v1(4808.87,2147.84) 4840.37,2147.84 D3.C@4844.28,2143.94
NetL1_2: L1.2 U9.1
NetLk_A: LK.A R16.1 | length 126
  Top Layer w8: v1(3114.76,2590.17) 3169.76,2535.17 v1(3169.76,2532.17)
  Bottom Layer w8: v1(3114.76,2590.17) 3115.07,2589.86 R16.1@3115.07,2568.87 ; v1(3169.76,2532.17) 3169.76,2509.98 LK.A@3170.91,2508.83
NetNM3_1: NM3.1 R29.2 U4.3 | length 866.4
  Top Layer w8: v1(4001.56,2404.97) 4067.35,2404.97 4220.95,2558.57 v1(4455.16,2558.57)
  Bottom Layer w8: U4.3@3965.24,2440.44 v1@4002.58,2403.09 ; v1(4001.56,2404.97) v1@4002.58,2403.09 ; R29.2@4031.41,2369.17 4031.41,2374.27 v1@4002.58,2403.09 ; v1(4455.16,2558.57) 4549.76,2558.57 4567.36,2576.17 4567.36,2650.87 4540.23,2678 NM3.1@4524.46,2678
NetNM3_3: NM3.3 R28.2 | length 132.8
  Bottom Layer w20: R28.2@4335.42,2591 4385.02,2640.6 NM3.3@4447.68,2640.6
NetPM4_1: PM4.1 R33.2 U10.13 | length 383.9
  Bottom Layer w8: U10.13@3994.2,2951.97 3993.46,2951.23 3993.46,2889.8 4047.99,2835.27 4110.36,2835.27 ; PM4.1@4110.36,2869.06 4110.36,2835.27 ; R33.2@4250.23,2815.17 4182.71,2815.17 4162.61,2835.27 4110.36,2835.27
NetR6_2: R6.2 U10.2 | length 79.4
  Bottom Layer w8: R6.2@3887.86,3241.34 3894.2,3235 U10.2@3894.2,3164.57
NetR7_2: R7.2 U10.3 | length 79.6
  Bottom Layer w8: U10.3@3944.2,3164.57 3944.2,3244.08 R7.2@3944.26,3244.14
NetR8_1: R8.1 U5.44 | length 88
  Bottom Layer w8: R8.1@2844.01,1997.04 2847.11,1993.94 U5.44@2930.71,1993.94
NetR10_2: R10.2 U4.44 | length 68.8
  Bottom Layer w8: U4.44@3937.4,2596.34 R10.2@3986.03,2644.97
NetR14_1: R14.1 Re.A | length 83.2
  Bottom Layer w8: R14.1@3226.75,2568.87 3282.59,2513.03 Re.A@3282.59,2508.83
NetR17_1: R17.1 USB1.2 | length 1572.8
  Top Layer w8: v1(4095.96,3327.17) 4529.07,3327.17 ; 4532.81,3323.42 4529.07,3327.17 ; v1(5274.76,2608.27) 5247.97,2608.27 4529.07,3327.17
  Bottom Layer w8: v1(4095.96,3327.17) 4096.73,3326.4 R17.1@4096.73,3295.1 ; USB1.2@5217.74,2611.92 5221.39,2608.27 v1(5274.76,2608.27)